# Altium PCB PCB1.PcbDoc
Units mm, origin at the board's own origin, x right, y up, seen from the top; angles counter-clockwise.
Board outline 152.4 x 101.6 mm, 2 copper layers (Top Layer, Bottom Layer); 10 components, 8 nets, 27 pads, 0 vias.
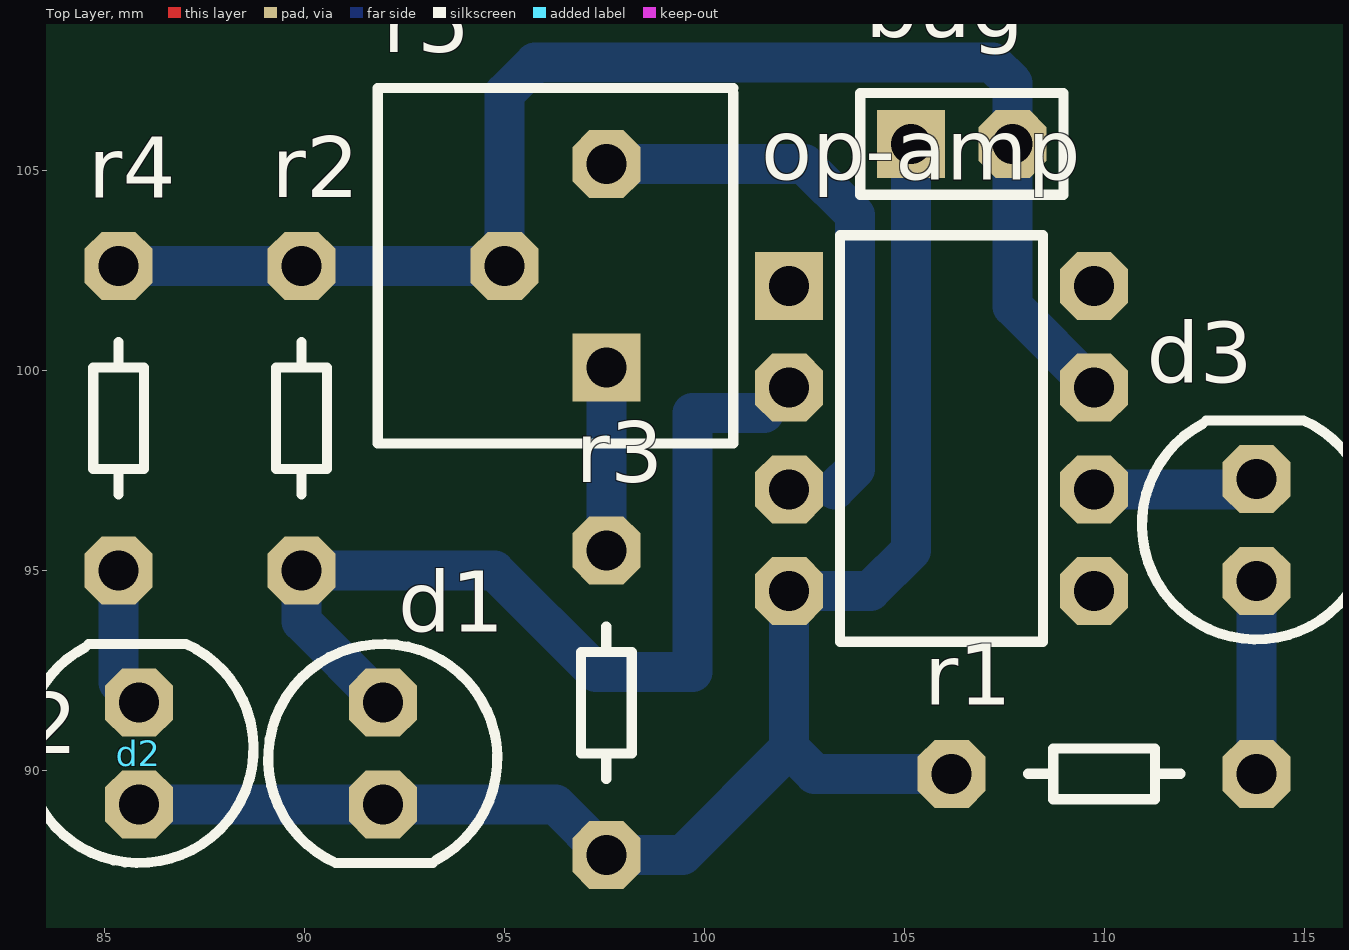
[diagram p0: Top Layer view]
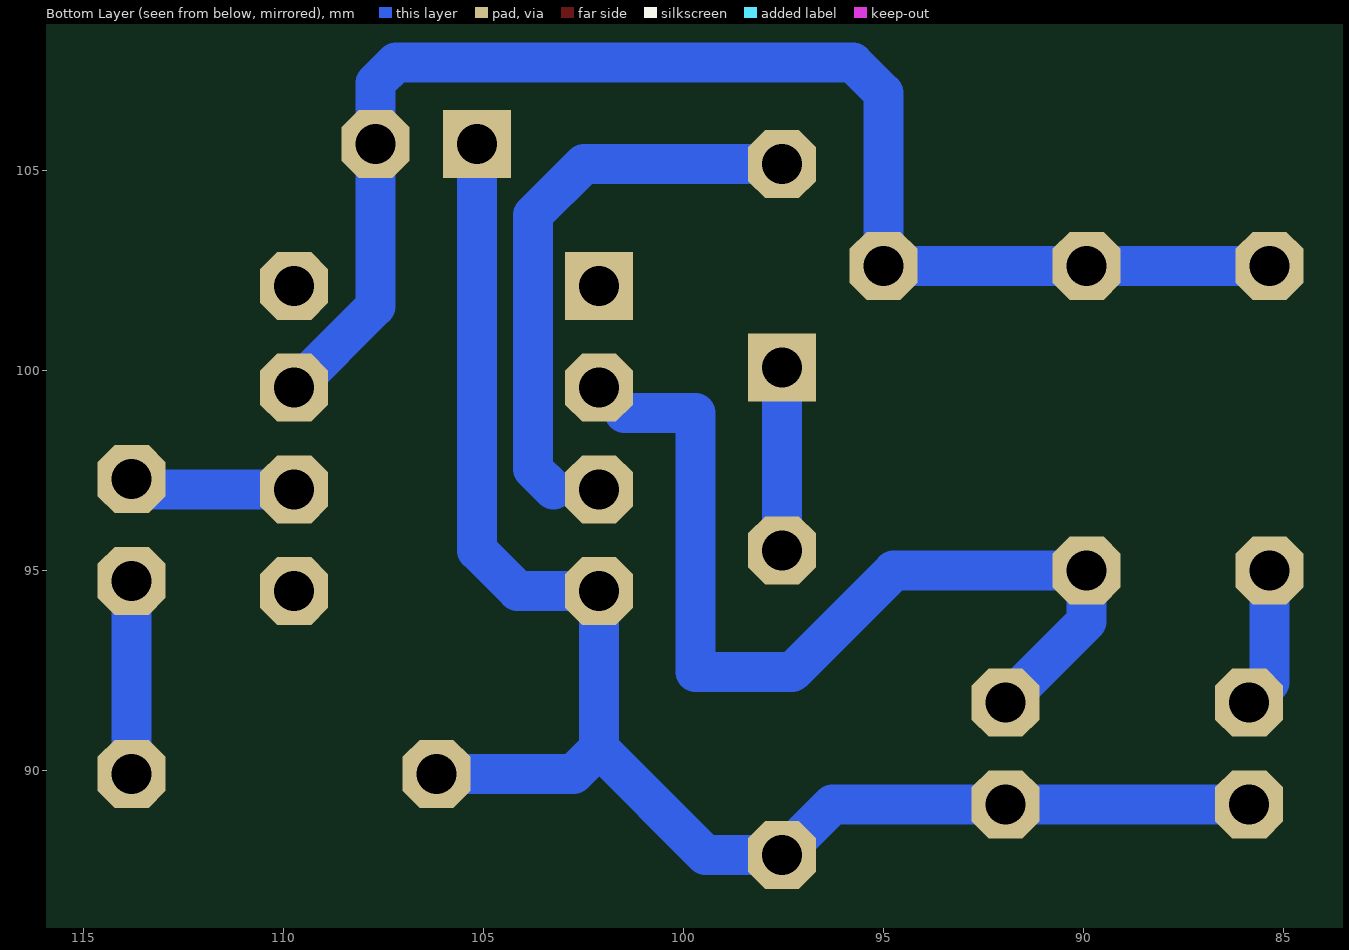
[diagram p1: Bottom Layer view, seen from below]

## Layer stack, top to bottom
Top Layer: signal copper 0.0356
Dielectric: dielectric 0.32, FR-4, Dk 4.8
Bottom Layer: signal copper 0.0356

## Board outline
25.4,25.4 177.8,25.4 177.8,127 25.4,127

## Design rules (kind name [scope] priority, off if disabled: settings)
Clearance [All] p1: gap=0.254
PolygonConnect [All] p1: connectstyle=Relief reliefconductorwidth=0.254 reliefentries=4 polygonreliefangle="90 Angle"
RoutingVias [All] p1: holewidth=0.711 width=1.27 viastyle="Through Hole" minholewidth=0.711 minwidth=1.27 maxholewidth=0.711 maxwidth=1.27
SilkscreenOverComponentPads [All] p1: minsilkscreentomaskgap=0.254
SolderMaskExpansion [All] p1: expansion=0.102
Width [All] p1: maxlimit=1 minlimit=1 preferedwidth=1
27 further rules are at their usual default settings.

## Components (designator, comment, footprint, x,y, rotation, side; value= is the part's Value field where it differs from the comment)
bug "pin" bergstrip-2pin 105.156,105.664 r270 top
d1 "led1" LED-BLUE 91.948,90.424 r90 top
d2 "led2" LED-BLUE 85.852,90.424 r270 top
d3 "led3" LED-BLUE 113.792,96.012 r270 top
op-amp "741" dip-8pin 102.108,94.488 r0 top
r1 "330ohm" res-2.54x4 113.792,89.916 r180 top
r2 "10k" res-2.54x4 89.916,94.996 r90 top
r3 "1k" res-2.54x4 97.536,87.884 r90 top
r4 "330ohm" res-2.54x4 85.344,94.996 r90 top
r5 "10k" reg-variable 94.996,102.616 r90 top

## Footprints (in the part's own frame and the unit in brackets; to place one, negate y for a bottom-side part, rotate by r counter-clockwise, add the part's x,y. Pads: shape width x height; smd on the part's side, far side on the other; paste and mask are expansions set on the pad)
bergstrip-2pin [mm]
  rect 1.7x1.7 hole 1: 1(0,0)
  oct 1.7x1.7 hole 1: 2(0,2.54)
  silkscreen extent -1.27,-1.27 1.27,3.81, body extent -1.27,-1.27 1.27,3.81, height 9.89
dip-8pin [mm]
  rect 1.7x1.7 hole 1: 1(0,7.62)
  oct 1.7x1.7 hole 1: 2(0,5.08) 3(0,2.54) 4(0,0) 5(7.62,0) 6(7.62,2.54) 7(7.62,5.08) 8(7.62,7.62)
  silkscreen extent 1.27,-1.27 6.35,8.89, body extent -0.13,-1.27 7.75,8.89, height 2.51
LED-BLUE [mm]
  oct 1.7x1.7 hole 1: 1(-1.27,0) 2(1.27,0)
  silkscreen extent -2.74,-2.86 2.74,2.86, body extent -2.91,-2.67 2.67,2.92, height 9
reg-variable [mm]
  rect 1.7x1.7 hole 1: 1(-2.54,-2.54)
  oct 1.7x1.7 hole 1: 2(0,0) 3(2.54,-2.54)
  silkscreen extent -4.44,-5.71 4.44,3.18, body extent -4.44,-5.71 4.44,3.18, height 5.1
res-2.54x4 [mm]
  oct 1.7x1.7 hole 1: 1(0,0) 2(7.62,0)
  silkscreen extent 1.91,-0.63 5.71,0.64, body extent -0.51,-0.98 8.11,1.02, height 3

## Part data
bug: library part "BURG STRIP 2"
d1 d2 d3: library part LED-BLUE, "Typical BLUE SiC LED"
op-amp: library part dip-8pin
r1 r2 r3 r4: library part "Resistor 2.54x4"
r5: library part "Variable Resistor"

## Nets (pads, with @x,y where several pads share a name; then routed paths per layer and width w, separated by ;. In a path a pad name is that pad's centre, name@x,y a point inside that pad or via, vN(x,y) a via of type N, cw(c..) or ccw(c..) an arc to the next point about the centre after c; other vN are vias at no path point)
2: d1.2 op-amp.2 r2.1 | length 23.2
  Bottom Layer w1: d1.2 89.916,93.726 r2.1 94.742,94.996 97.282,92.456 99.695,92.456 99.695,98.933 op-amp.2@101.473,98.933
3: op-amp.3 r5.3 | length 13.8
  Bottom Layer w1: r5.3 102.489,105.156 103.759,103.886 103.759,97.536 103.251,97.028
6: d3.1 op-amp.6 | length 4.2
  Bottom Layer w1: op-amp.6 113.538,97.028 d3.1
9: r3.2 r5.1 | length 4.6
  Bottom Layer w1: r3.2 r5.1
10: d2.1 r4.1 | length 2.8
  Bottom Layer w1: d2.1@85.344,92.202 r4.1
11: d3.2 r1.1 | length 4.8
  Bottom Layer w1: r1.1 d3.2
GND: bug.1 d1.1 d2.2 op-amp.4 r1.2 r3.1 | length 41
  Bottom Layer w1: d2.2 d1.1 96.266,89.154 r3.1 99.441,87.884 102.108,90.551 ; 105.156,104.394 bug.1 105.156,95.504 104.14,94.488 op-amp.4 102.108,90.551 ; r1.2 102.743,89.916 102.108,90.551
VCC: bug.2 op-amp.7 r2.2 r4.2 r5.2 | length 35.7
  Bottom Layer w1: r4.2 r2.2 r5.2 94.996,106.934 95.758,107.696 107.188,107.696 107.696,107.188 bug.2 107.696,101.6 op-amp.7
pads on no net: op-amp.1 op-amp.5 op-amp.8